# EAGLE board fmcboard_v1.0 (EAGLE 9.6.2)
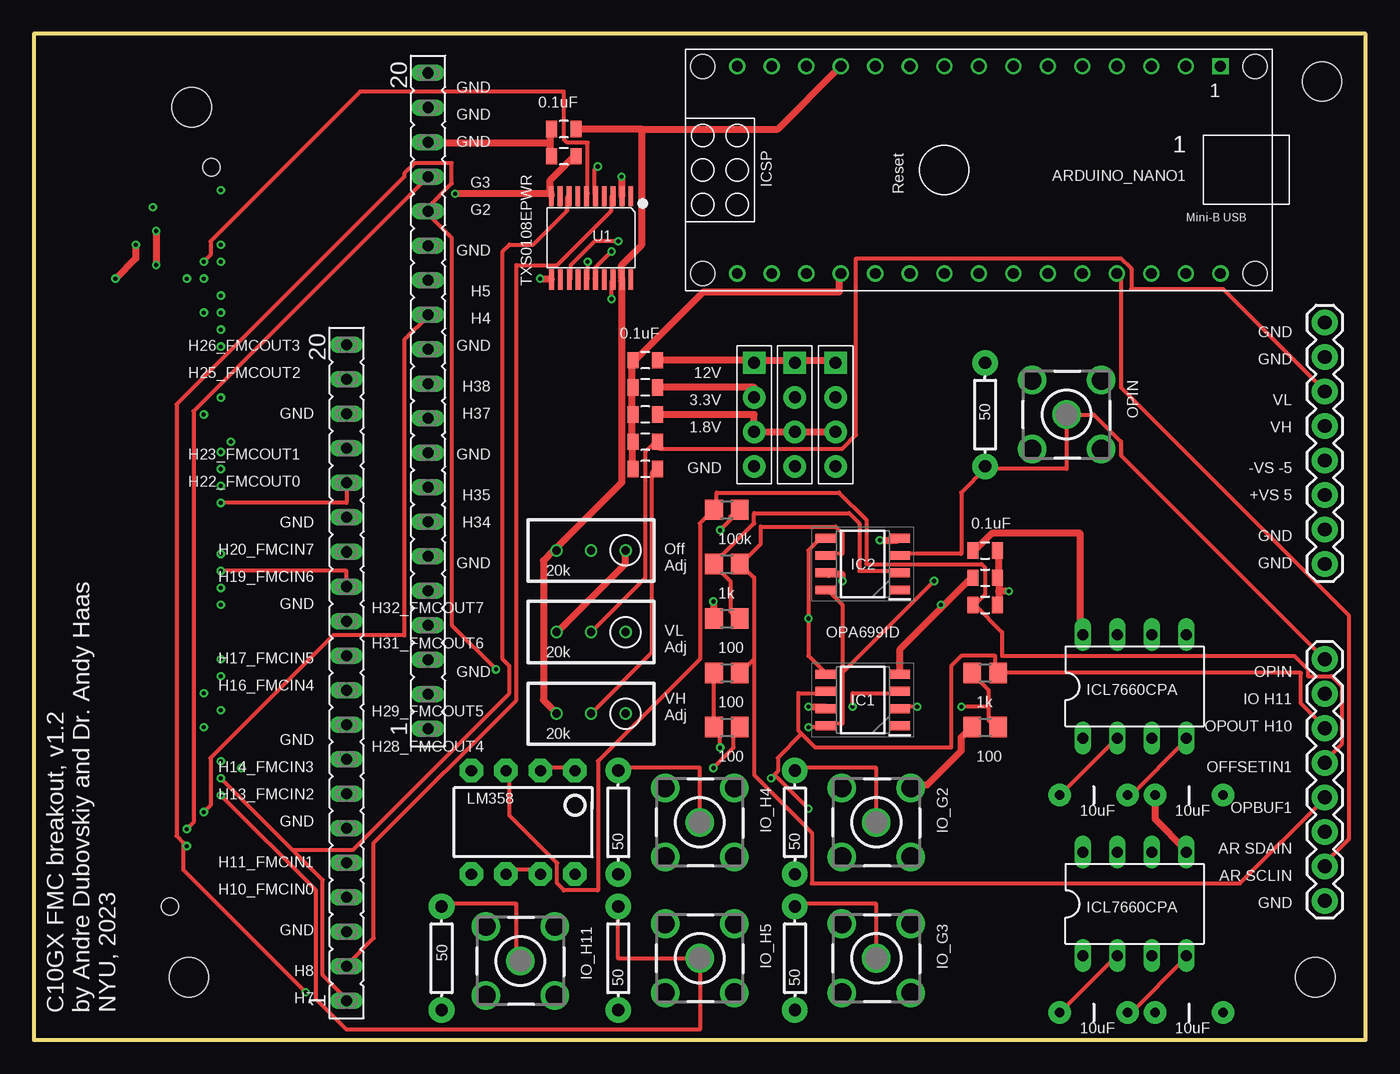
[diagram p0: board, top side]
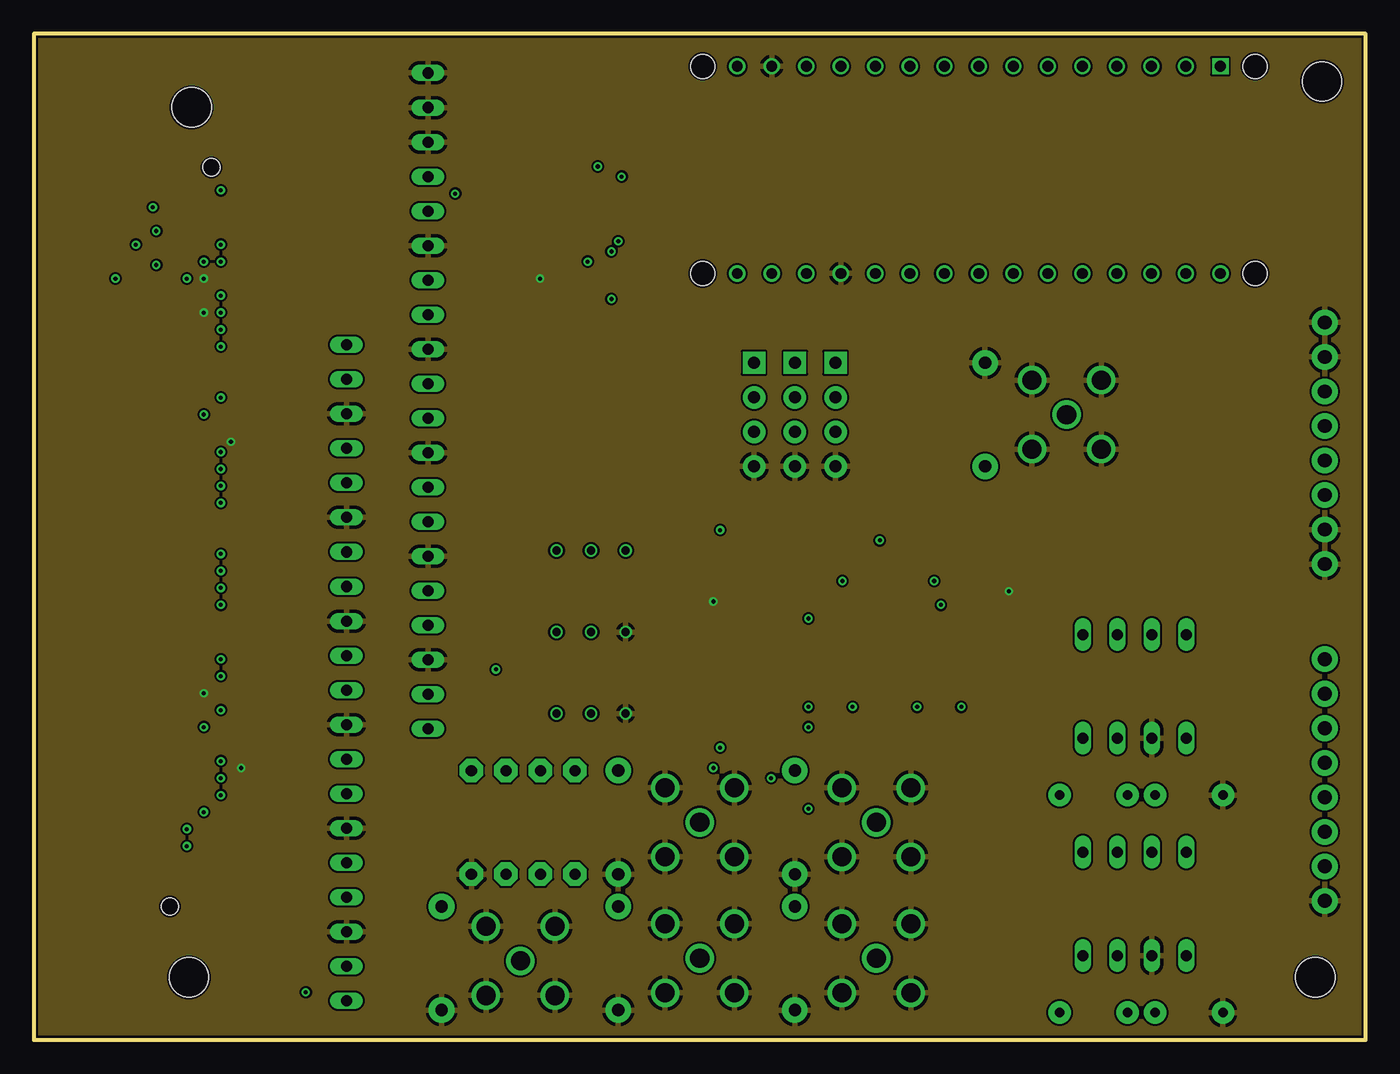
[diagram p1: board, inner layer topgnd]
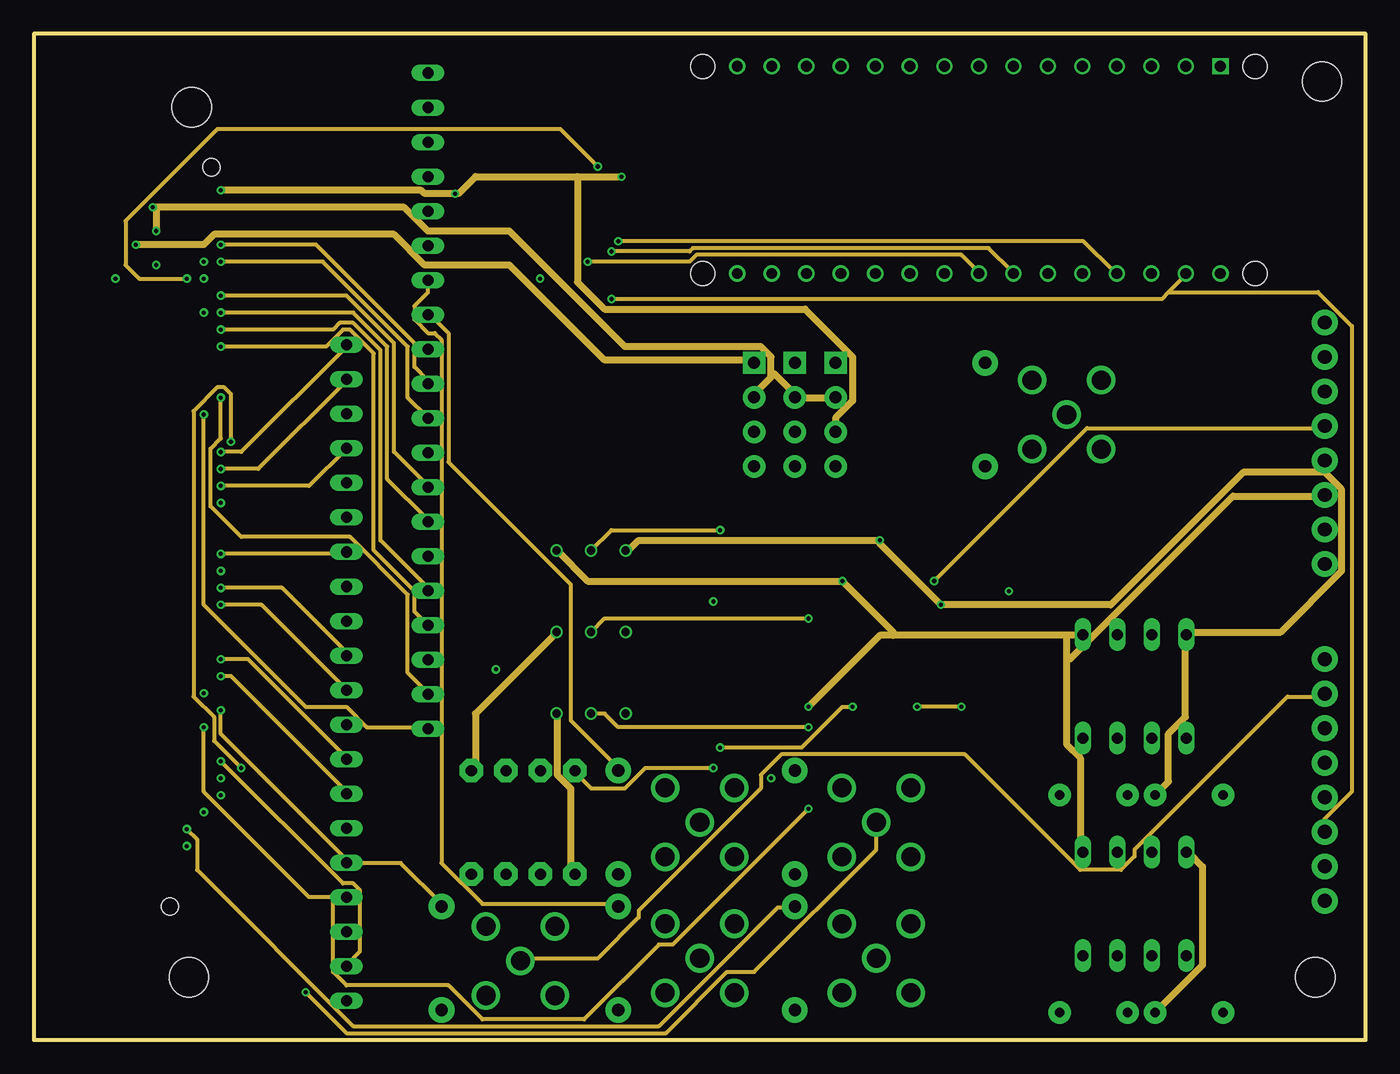
[diagram p2: board, inner layer route]
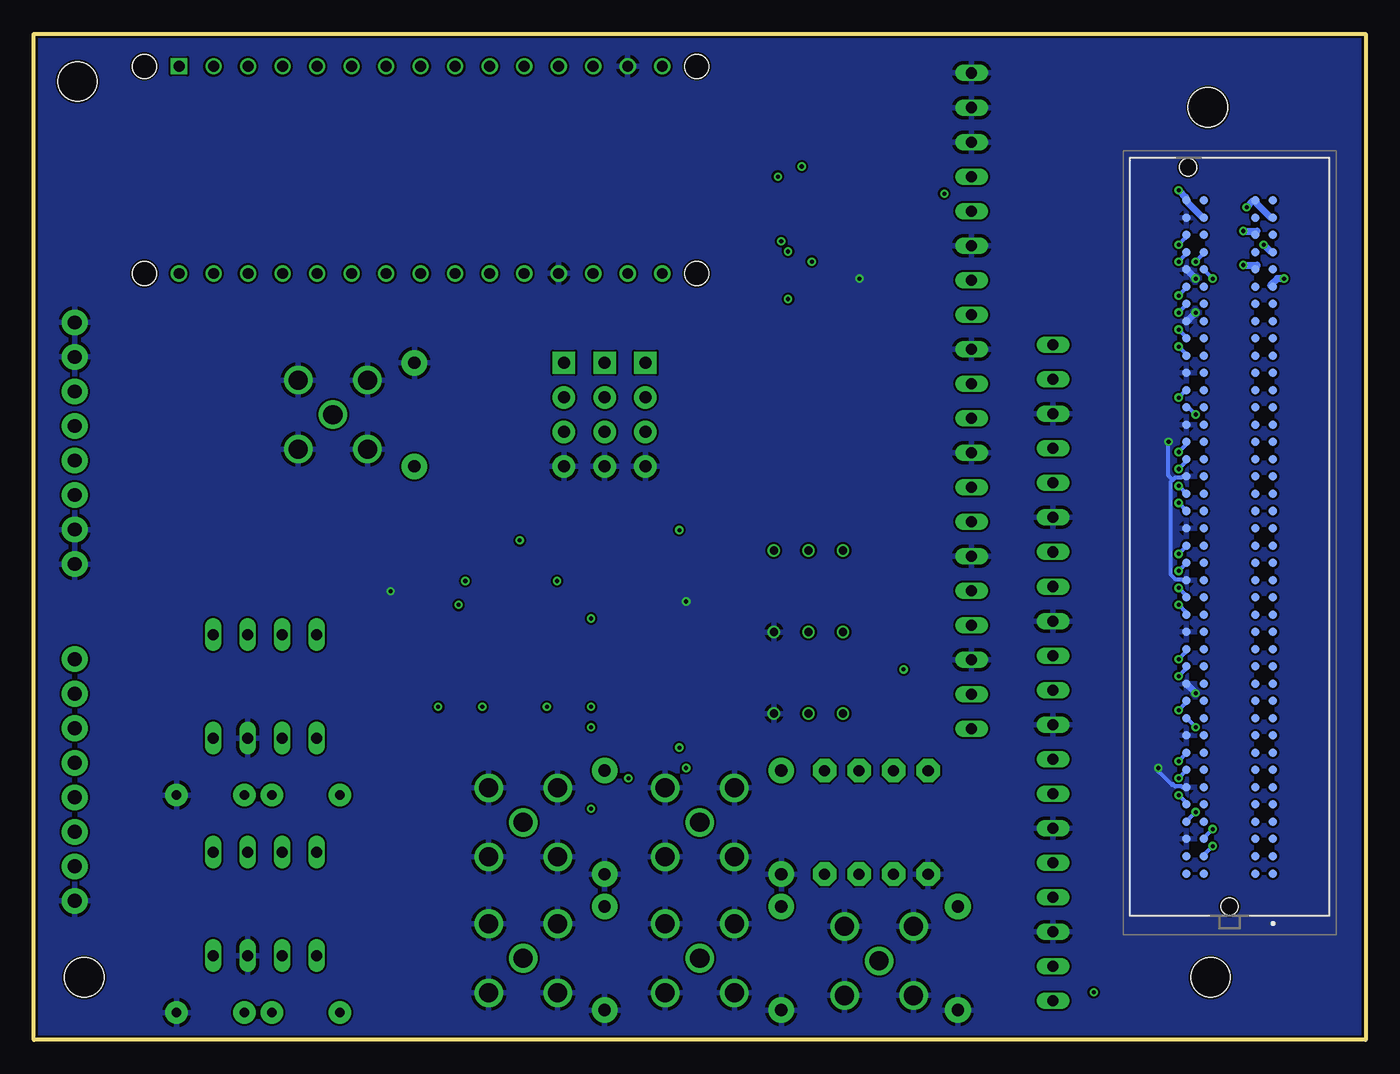
[diagram p3: board, bottom side, seen from below]

Size 98 x 74 mm. Coordinates in mm from the lower left corner, seen from the top.
Outline: 0,74 0,0 98,0 98,74 0,74
Copper layers (1*2*15*16): top 0.035mm / dielectric 0.2mm / topgnd 0.0175mm / dielectric 0.3mm / route 0.0175mm / dielectric 0.2mm / gnd 0.035mm
Design rules "Seeed_AllPCB_MacroFab_haas6mil": minimum track width 6mil, minimum drill 12mil, track to track 6mil, track to pad 6mil, pad to pad 6mil, via to via 6mil, smd to smd 0mil, copper to edge 6mil, drill to drill 6mil, minimum pad ring 6mil, minimum via ring 6mil, stop-mask expansion 6mil, vias tented up to drill 25mil, thermal gap 10mil
Net classes: 0 default: width 0.305 mm; 1 power: width 0.508 mm; 2 gnd: width 0.305 mm
Holes 2.9 mm at 11.4,4.6 94.8,70.5 11.6,68.6 94.3,4.6

## Footprints (pad centres in the part's own frame; a part is rotated, then mirrored left to right if it is on the bottom)
ARDUINO_NANO = drill 0.8 square: 1 -20.32,-7.62 | drill 0.8: 2 -17.78,-7.62; 3 -15.24,-7.62; 4 -12.7,-7.62; 5 -10.16,-7.62; 6 -7.62,-7.62; 7 -5.08,-7.62; 8 -2.54,-7.62; 9 0,-7.62; 10 2.54,-7.62; 11 5.08,-7.62; 12 7.62,-7.62; 13 10.16,-7.62; 14 12.7,-7.62; 15 15.24,-7.62; 16 15.24,7.62; 17 12.7,7.62; 18 10.16,7.62; 19 7.62,7.62; 20 5.08,7.62; 21 2.54,7.62; 22 0,7.62; 23 -2.54,7.62; 24 -5.08,7.62; 25 -7.62,7.62; 26 -10.16,7.62; 27 -12.7,7.62; 28 -15.24,7.62; 29 -17.78,7.62; 30 -20.32,7.62 | hole 1.778: -22.86,-7.62; -22.86,7.62; 17.78,7.62; 17.78,-7.62
CAP-PTH-5MM = drill 0.7 pad 1.651: 1 -2.5,0; 2 2.5,0
0805 = smd 0.8 x 1.2: 1 -0.9,0; 2 0.9,0
SOIC127P600X175-8N = smd 1.528 x 0.65: 1 -2.711,1.905; 2 -2.711,0.635; 3 -2.711,-0.635; 4 -2.711,-1.905; 5 2.711,-1.905; 6 2.711,-0.635; 7 2.711,0.635; 8 2.711,1.905
DIL08 = drill 0.813 long: 1 -3.81,-3.81; 2 -1.27,-3.81; 3 1.27,-3.81; 4 3.81,-3.81; 5 3.81,3.81; 6 1.27,3.81; 7 -1.27,3.81; 8 -3.81,3.81
DIP08 = drill 0.813 pad 1.727 octagon: 1 -3.81,-3.81; 2 -1.27,-3.81; 3 1.27,-3.81; 4 3.81,-3.81; 5 3.81,3.81; 6 1.27,3.81; 7 -1.27,3.81; 8 -3.81,3.81
BU-SMB-V = drill 1.4: 1 0,0; 2 -2.54,2.54; 3 2.54,2.54; 4 2.54,-2.54; 5 -2.54,-2.54
1X08 = drill 1.016 pad 1.88: 1 0,0; 2 2.54,0; 3 5.08,0; 4 7.62,0; 5 10.16,0; 6 12.7,0; 7 15.24,0; 8 17.78,0
ASP13460401 = smd 0.64 x 0.64: C1 24.765,3.175; C2 23.495,3.175; C3 22.225,3.175; C4 20.955,3.175; C5 19.685,3.175; C6 18.415,3.175; C7 17.145,3.175; C8 15.875,3.175; C9 14.605,3.175; C10 13.335,3.175; C11 12.065,3.175; C12 10.795,3.175; C13 9.525,3.175; C14 8.255,3.175; C15 6.985,3.175; C16 5.715,3.175; C17 4.445,3.175; C18 3.175,3.175; C19 1.905,3.175; C20 0.635,3.175; C21 -0.635,3.175; C22 -1.905,3.175; C23 -3.175,3.175; C24 -4.445,3.175; C25 -5.715,3.175; C26 -6.985,3.175; C27 -8.255,3.175; C28 -9.525,3.175; C29 -10.795,3.175; C30 -12.065,3.175; C31 -13.335,3.175; C32 -14.605,3.175; C33 -15.875,3.175; C34 -17.145,3.175; C35 -18.415,3.175; C36 -19.685,3.175; C37 -20.955,3.175; C38 -22.225,3.175; C39 -23.495,3.175; C40 -24.765,3.175; D1 24.765,1.905; D2 23.495,1.905; D3 22.225,1.905; D4 20.955,1.905; D5 19.685,1.905; D6 18.415,1.905; D7 17.145,1.905; D8 15.875,1.905; D9 14.605,1.905; D10 13.335,1.905; D11 12.065,1.905; D12 10.795,1.905; D13 9.525,1.905; D14 8.255,1.905; D15 6.985,1.905; D16 5.715,1.905; D17 4.445,1.905; D18 3.175,1.905; D19 1.905,1.905; D20 0.635,1.905; D21 -0.635,1.905; D22 -1.905,1.905; D23 -3.175,1.905; D24 -4.445,1.905; D25 -5.715,1.905; D26 -6.985,1.905; D27 -8.255,1.905; D28 -9.525,1.905; D29 -10.795,1.905; D30 -12.065,1.905; D31 -13.335,1.905; D32 -14.605,1.905; D33 -15.875,1.905; D34 -17.145,1.905; D35 -18.415,1.905; D36 -19.685,1.905; D37 -20.955,1.905; D38 -22.225,1.905; D39 -23.495,1.905; D40 -24.765,1.905; G1 24.765,-1.905; G2 23.495,-1.905; G3 22.225,-1.905; G4 20.955,-1.905; G5 19.685,-1.905; G6 18.415,-1.905; G7 17.145,-1.905; G8 15.875,-1.905; G9 14.605,-1.905; G10 13.335,-1.905; G11 12.065,-1.905; G12 10.795,-1.905; G13 9.525,-1.905; G14 8.255,-1.905; G15 6.985,-1.905; G16 5.715,-1.905; G17 4.445,-1.905; G18 3.175,-1.905; G19 1.905,-1.905; G20 0.635,-1.905; G21 -0.635,-1.905; G22 -1.905,-1.905; G23 -3.175,-1.905; G24 -4.445,-1.905; G25 -5.715,-1.905; G26 -6.985,-1.905; G27 -8.255,-1.905; G28 -9.525,-1.905; G29 -10.795,-1.905; G30 -12.065,-1.905; G31 -13.335,-1.905; G32 -14.605,-1.905; G33 -15.875,-1.905; G34 -17.145,-1.905; G35 -18.415,-1.905; G36 -19.685,-1.905; G37 -20.955,-1.905; G38 -22.225,-1.905; G39 -23.495,-1.905; G40 -24.765,-1.905; H1 24.765,-3.175; H2 23.495,-3.175; H3 22.225,-3.175; H4 20.955,-3.175; H5 19.685,-3.175; H6 18.415,-3.175; H7 17.145,-3.175; H8 15.875,-3.175; H9 14.605,-3.175; H10 13.335,-3.175; H11 12.065,-3.175; H12 10.795,-3.175; H13 9.525,-3.175; H14 8.255,-3.175; H15 6.985,-3.175; H16 5.715,-3.175; H17 4.445,-3.175; H18 3.175,-3.175; H19 1.905,-3.175; H20 0.635,-3.175; H21 -0.635,-3.175; H22 -1.905,-3.175; H23 -3.175,-3.175; H24 -4.445,-3.175; H25 -5.715,-3.175; H26 -6.985,-3.175; H27 -8.255,-3.175; H28 -9.525,-3.175; H29 -10.795,-3.175; H30 -12.065,-3.175; H31 -13.335,-3.175; H32 -14.605,-3.175; H33 -15.875,-3.175; H34 -17.145,-3.175; H35 -18.415,-3.175; H36 -19.685,-3.175; H37 -20.955,-3.175; H38 -22.225,-3.175; H39 -23.495,-3.175; H40 -24.765,-3.175 | hole 1.27: 27.189,0; -27.191,-3.05
H4-2.54 = drill 0.889 pad 1.651 square: 1 0,3.81 | drill 0.889 pad 1.651: 2 0,1.27; 3 0,-1.27; 4 0,-3.81
RTRIM3296W = drill 0.61: 1 0,-2.54; 2 0,0; 3 0,2.54
AXIAL-0.3 = drill 0.9 pad 1.88: P$1 -3.81,0; P$2 3.81,0
R0805 = smd 1.3 x 1.5: 1 -0.95,0; 2 0.95,0
FE20 = drill 0.813 long: 1 -24.13,0; 2 -21.59,0; 3 -19.05,0; 4 -16.51,0; 5 -13.97,0; 6 -11.43,0; 7 -8.89,0; 8 -6.35,0; 9 -3.81,0; 10 -1.27,0; 11 1.27,0; 12 3.81,0; 13 6.35,0; 14 8.89,0; 15 11.43,0; 16 13.97,0; 17 16.51,0; 18 19.05,0; 19 21.59,0; 20 24.13,0
TSSOP20-0.65-6.5X4.4MM = smd 0.35 x 1.5: 1 -2.925,-3.065; 2 -2.275,-3.065; 3 -1.625,-3.065; 4 -0.975,-3.065; 5 -0.325,-3.065; 6 0.325,-3.065; 7 0.975,-3.065; 8 1.625,-3.065; 9 2.275,-3.065; 10 2.925,-3.065; 11 2.91,3.065; 12 2.26,3.065; 13 1.61,3.065; 14 0.96,3.065; 15 0.325,3.065; 16 -0.325,3.065; 17 -0.975,3.065; 18 -1.625,3.065; 19 -2.275,3.065; 20 -2.925,3.065

## Placement (x,y rotation side)
ARDUINO_NANO1  1  [ARDUINO_NANO]  67,64 180 top
C1  10uF  [CAP-PTH-5MM]  78,2 0 top
C2  10uF  [CAP-PTH-5MM]  85,2 0 top
C3  0.1uF  [0805]  70,36 0 top
C4  10uF  [CAP-PTH-5MM]  78,18 0 top
C5  0.1uF  [0805]  45,46 180 top
C6  10uF  [CAP-PTH-5MM]  85,18 0 top
C7  0.1uF  [0805]  45,42 180 top
C8  0.1uF  [0805]  45,44 180 top
C9  0.1uF  [0805]  39,67 180 top
C10  0.1uF  [0805]  70,34 0 top
C11  0.1uF  [0805]  70,32 0 top
C12  0.1uF  [0805]  45,50 180 top
C13  0.1uF  [0805]  45,48 180 top
C14  0.1uF  [0805]  39,65 180 top
IC1  OPA699ID  [SOIC127P600X175-8N]  61,25 180 top
IC2  OPA699ID  [SOIC127P600X175-8N]  61,35 180 top
IC3  ICL7660CPA  [DIL08]  81,26 0 top
IC4  ICL7660CPA  [DIL08]  81,10 0 top
IC5  LM358  [DIP08]  36,16 180 top
IO_G2  BU-SMB-V  [BU-SMB-V]  62,16 270 top
IO_G3  BU-SMB-V  [BU-SMB-V]  62,6 270 top
IO_H4  BU-SMB-V  [BU-SMB-V]  49,16 270 top
IO_H5  BU-SMB-V  [BU-SMB-V]  49,6 270 top
IO_H11  BU-SMB-V  [BU-SMB-V]  35.8,5.8 270 top
J1  8pin  [1X08]  95,35 90 top
J2  ASP-134604-01  [ASP13460401]  10,37 270 bottom
J3  4p-2.54  [H4-2.54]  59,46 0 top
J4  4p-2.54  [H4-2.54]  56,46 0 top
J5  8pin  [1X08]  95,28 270 top
J12  4p-2.54  [H4-2.54]  53,46 0 top
OPIN  BU-SMB-V  [BU-SMB-V]  76,46 270 top
R1  20k  [RTRIM3296W]  41,36 90 top
R2  50  [AXIAL-0.3]  70,46 270 top
R3  100k  [R0805]  51,39 0 top
R4  50  [AXIAL-0.3]  56,16 90 top
R5  50  [AXIAL-0.3]  56,6 90 top
R6  50  [AXIAL-0.3]  30,6 90 top
R7  20k  [RTRIM3296W]  41,24 90 top
R8  20k  [RTRIM3296W]  41,30 90 top
R9  1k  [R0805]  70,27 0 top
R10  100  [R0805]  70,23 0 top
R11  1k  [R0805]  51,35 0 top
R12  100  [R0805]  51,31 0 top
R13  100  [R0805]  51,27 0 top
R14  100  [R0805]  51,23 0 top
R15  50  [AXIAL-0.3]  43,16 90 top
R16  50  [AXIAL-0.3]  43,6 90 top
SV1  20  [FE20]  23,27 90 top
SV2  20  [FE20]  29,47 90 top
U1  TXS0108EPWR  [TSSOP20-0.65-6.5X4.4MM]  41,59 180 top

## Library data of the parts
ARDUINO_NANO1 = ArduinoNanoV30
C1 C2 C4 C6 = SparkFun-Capacitors
C3 C5 C7-C14 = SparkFun-Passives
IC1 IC2 = OPA699ID; DESCRIPTION: Texas Instruments OPA699ID Op Amp, 880MHz, 9 V, 8-Pin SOIC; HEIGHT: 1.75mm; MANUFACTURER_NAME: Texas Instruments; MANUFACTURER_PART_NUMBER: OPA699ID; MOUSER_PART_NUMBER: 595-OPA699ID; MOUSER_PRICE-STOCK: https://www.mouser.co.uk/ProductDetail/Texas-Instruments/OPA699ID?qs=wgAEGBTxy7n0Nk%252BpyQzyiA%3D%3D
IC3 IC4 = maxim; MF: INTERSIL; MPN: ICL7660CPA; OC_FARNELL: 1018170; OC_NEWARK: 06F7441
IC5 = SparkFun-AnalogIC; PROD_ID: IC-09172
IO_G2 IO_G3 IO_H4 IO_H5 IO_H11 OPIN = con-coax; OC_FARNELL: unknown; OC_NEWARK: unknown
J1 J5 = SparkFun-Connectors; PROD_ID: CONN-08438
J2 = ASP-134604-01; DESCRIPTION: SAMTEC - ASP-134604-01 - Board-To-Board Connector, Vita 57 XMC, 1.27 mm, 160 Contacts, Header, ASP Series, Surface Mount; HEIGHT: 7.11mm; MANUFACTURER_NAME: SAMTEC; MANUFACTURER_PART_NUMBER: ASP-134604-01; MOUSER_PART_NUMBER: 200-ASP-134604-01; MOUSER_PRICE-STOCK: https://www.mouser.co.uk/ProductDetail/Samtec/ASP-134604-01?qs=Rp%2FUEJiACm00i8g2mQ6XNw%3D%3D
J3 J4 J12 = Seeed-Connector; MPN: F185-1104A1BSYA1
R1 R7 R8 = resistor
R2 R4-R6 R15 R16 = SparkFun-Resistors
R3 R9-R14 = rcl; SPICEPREFIX: R
SV1 SV2 = con-lsta; OC_FARNELL: unknown; OC_NEWARK: unknown
U1 = Seeed-IC; MPN: TXS0108EPWR

## Nets
1V8 [power]: C5.1 C14.1 J2.G39 J2.H40 J3.3 J4.3 J12.3 U1.2 U1.10
3V3 [power]: C13.1 J2.C39 J2.D36 J2.D38 J2.D40 J3.2 J4.2 J12.2
12V [power]: C12.1 J2.C35 J2.C37 J3.1 J4.1 J12.1
AR_G36: ARDUINO_NANO1.24 U1.16
AR_G37: ARDUINO_NANO1.23 U1.15
AR_SCLIN: ARDUINO_NANO1.27 J5.7 U1.13
AR_SDAIN: ARDUINO_NANO1.29 J5.6 U1.18
G2: IO_G2.1 J2.G2 R4.P$2 SV2.16
G3: IO_G3.1 J2.G3 R5.P$2 SV2.17
G36: J2.G36 U1.5
G37: J2.G37 U1.6
GND [gnd]: ARDUINO_NANO1.14 ARDUINO_NANO1.19 C2.2 C3.2 C5.2 C6.2 C7.2 C8.2 C9.2 C10.2 C11.2 C12.2 C13.2 C14.2 IC3.3 IC4.3 IC5.5 IO_G2.2 IO_G2.3 IO_G2.4 IO_G2.5 IO_G3.2 IO_G3.3 IO_G3.4 IO_G3.5 IO_H4.2 IO_H4.3 IO_H4.4 IO_H4.5 IO_H5.2 IO_H5.3 IO_H5.4 IO_H5.5 IO_H11.2 IO_H11.3 IO_H11.4 IO_H11.5 J1.1 J1.2 J1.7 J1.8 J2.H3 J2.H6 J2.H9 J2.H12 J2.H15 J2.H18 J2.H21 J2.H24 J2.H27 J2.H30 J2.H33 J2.H36 J2.H39 J3.4 J4.4 J5.8 J12.4 OPIN.2 OPIN.3 OPIN.4 OPIN.5 R2.P$1 R4.P$1 R5.P$1 R6.P$1 R7.1 R8.1 R10.1 R12.1 R15.P$1 R16.P$1 SV1.3 SV1.6 SV1.9 SV1.12 SV1.15 SV1.18 SV2.3 SV2.6 SV2.9 SV2.12 SV2.15 SV2.18 SV2.19 SV2.20 U1.11
H4: IO_H4.1 J2.H4 R15.P$2 SV2.13
H5: IO_H5.1 J2.H5 R16.P$2 SV2.14
H13: J2.H13 SV1.7
H14: J2.H14 SV1.8
H16: J2.H16 SV1.10
H17: J2.H17 SV1.11
H19: J2.H19 SV1.13
H20: J2.H20 SV1.14
H22: J2.H22 SV1.16
H23: J2.H23 SV1.17
H25: J2.H25 SV1.19
H26: J2.H26 SV1.20
H27: J2.H28 SV2.1
H28: J2.H29 SV2.2
H31: J2.H31 SV2.4
H32: J2.H32 SV2.5
H34: J2.H34 SV2.7
H35: J2.H35 SV2.8
H37: J2.H37 SV2.10
H38: J2.H38 SV2.11
IO1: IC2.3 J5.1 OPIN.1 R2.P$2
IO2_H11: IO_H11.1 J2.H11 J5.2 R6.P$2 SV1.5
N$1: IC1.3 R13.1 R14.1
N$2: C4.1 IC3.2
N$3: IC1.2 R9.1 R10.2
N$4: C4.2 IC3.4
N$5: C1.1 IC4.2
N$6: C1.2 IC4.4
N$7: IC2.2 R11.1 R12.2
N$8: R1.2 R3.2
N$9: IC5.6 IC5.7
OFFSETIN1: C11.1 IC5.3 J5.4 R3.1
OPBUF1: IC2.6 J5.5 R11.2 R13.2
OPOUT1_H10: IC1.6 J2.H10 J5.3 R9.2 SV1.4
SCLIN: J2.H7 SV1.1 U1.8
SDAIN: J2.H8 SV1.2 U1.3
VH: C7.1 IC1.8 IC2.8 J1.5 R7.2
VIN [power]: ARDUINO_NANO1.15
VIN1: IC5.1 IC5.2 R14.2
VL: C8.1 IC1.5 IC2.5 J1.6 R8.2
VS+ [power]: ARDUINO_NANO1.12 C3.1 C9.1 IC1.7 IC2.7 IC3.8 IC4.8 IC5.8 J1.3 R1.3 R7.3 U1.19
VS- [power]: C2.1 C6.1 C10.1 IC1.4 IC2.4 IC3.5 IC4.5 IC5.4 J1.4 R1.1 R8.3

## Tracks (layer width: path | path; a pad name or v marks a point on that pad's centre or on a via)
1V8  (via drill 0.3)
  top 0.508: C5.1 53,46 J12.3 53.25,44.75 56,44.75 J4.3 56.25,44.75 59,44.75 J3.3 | v31,62.25 38,62.25 U1.10 38,62.5 38,63.25 39.75,65 C14.1 | v43.25,63.5 43.25,62.25 U1.2
  route 0.508: v13.75,62.5 28.5,62.5 28.75,62.25 v31,62.25 31.25,62.25 32.5,63.5 40,63.5 | 40,63.5 v43.25,63.5 | J3.3 59,45.75 60.25,47 60.25,50.25 56.75,53.75 42,53.75 40,55.75 40,63.5
  gnd 0.508: v13.75,62.5 13.25,62 J2.H40 13,61.5 12,60.5 J2.G39
3V3  (via drill 0.3)
  top 0.508: C13.1 53,48 J12.2 | v9,59.5 v9,57
  route 0.508: 9,61.25 27.25,61.25 29,59.5 35,59.5 43.5,51 53.5,51 54.25,50.25 54.25,49 | 9,61.25 v8.75,61.25 | 54.25,49 54.25,48.75 53,47.5 J12.2 | 54.25,49 54.5,49 56,47.5 J4.2 56.25,47.25 59,47.25 J3.2 | 9,61.25 v9,59.5
  gnd 0.508: v8.75,61.25 8.25,61.75 J2.D40 8,61.5 7,60.5 J2.C39 | v9,57 8,57 J2.D36 | v9,59.5 8,59.5 J2.D38
12V  (via drill 0.3)
  top 0.508: C12.1 53,50 J12.1 53.25,50 56,50 J4.1 56.25,50 59,50 J3.1 | v6,56 7.5,57.5 v7.5,58.5
  route 0.508: v7.5,58.5 12.5,58.5 13.25,59.25 26.5,59.25 28.75,57 35,57 42,50 53,50 J12.1
  gnd 0.508: v7.5,58.5 7,58 J2.C37 | v6,56 6.5,56 7,55.5 J2.C35
AR_G36  (via drill 0.3)
  top 0.305: v42.5,58 41.25,56.75 41.25,56 U1.16
  route 0.305: v42.5,58 48.25,58 48.5,58.25 70.25,58.25 72,56.5 ARDUINO_NANO1.24
AR_G37  (via drill 0.3)
  top 0.305: v40.75,57.25 40.75,56 U1.15
  route 0.305: v40.75,57.25 48.25,57.25 48.75,57.75 68.25,57.75 69.5,56.5 ARDUINO_NANO1.23
AR_SCLIN  (via drill 0.3)
  top 0.305: v43,58.75 41.25,58.75 39.5,57 39.5,56 U1.13 | J5.7 95,13 96.75,14.75 96.75,31.25 80,48 80,56 79.75,56.25 ARDUINO_NANO1.27
  route 0.305: v43,58.75 77.25,58.75 79.5,56.5 ARDUINO_NANO1.27
AR_SDAIN  (via drill 0.3)
  top 0.305: v42.5,54.5 42.5,55.75 U1.18
  route 0.305: v42.5,54.5 83,54.5 83.5,55 | 83.5,55 84.75,56.25 ARDUINO_NANO1.29 | J5.6 95,16.25 97,18.25 97,52.5 94.5,55 83.5,55
G2  (via drill 0.3)
  top 0.305: IO_G2.1 62,20 56,20 R4.P$2 | 11,14.5 10.5,15 10.5,46.75 27.25,63.5 27.25,63.75 28,64.5 30.75,64.5 30.75,63 29,61.25 SV2.16 29,60.75 30.75,59 30.75,30.5 v34,27.25 | 11,14.5 v11.25,14.25 | v20,3.5 11,12.5 11,14.5
  route 0.305: IO_G2.1 62,14 53,5 51,5 46.5,0.5 23,0.5 v20,3.5
  gnd 0.305: v11.25,14.25 11.75,13.75 J2.G2
G3  (via drill 0.3)
  top 0.305: IO_G3.1 62,10 56,10 R5.P$2 | v11.25,15.5 11.75,16 11.75,46.25 SV2.17
  route 0.305: v11.25,15.5 12,14.75 12,12.5 23.5,1 46,1 54.75,9.75 56,9.75 R5.P$2
  gnd 0.305: v11.25,15.5 11.75,15 J2.G3
G36  (via drill 0.3)
  top 0.305: v41.5,64.25 41.25,64 41.25,62.25 U1.5
  route 0.305: v11.25,56 7.75,56 6.75,57 6.75,60.25 13.5,67 38.75,67 v41.5,64.25
  gnd 0.305: v11.25,56 11.75,56.5 J2.G36
G37  (via drill 0.3)
  top 0.305: v12.5,57.25 13,57.75 13,58.75 24,69.75 39,69.75 39,66.25 39.25,66 40.75,66 40.75,62.25 U1.6
  gnd 0.305: v12.5,57.25 12,57.75 J2.G37
GND  (via drill 0.3)
  top 0.508: C7.2 44,42 44,44 C8.2 44,44.25 44,46 C5.2 44,46.25 44,48 C13.2 44,48.25 44,50 C12.2 44.25,50 49.25,55 59.25,55 59.25,56.25 ARDUINO_NANO1.19 | 71,33 71,34 C10.2 71,34.25 71,36 C3.2 | 71,33 71,32 C11.2 | 38,66 38,67 C9.2 | 38,66 38,65 C14.2 | R10.1 69,23 68.25,22.25 68.25,21.25 65.75,18.75 64.75,18.75 IO_G2.2 | v37.25,56 38,56 U1.11 | v50,32.25 50,31 R12.1 | 38,66 29,66 SV2.18 | v71.75,33 71,33
  route 0.305: v15.25,20 13.25,22 13.25,23.75 11.75,25.25 11.75,46.25 13.5,48 14,48 14.5,47.5 v14.5,44
  gnd 0.305: J2.H24 13.44,41.45 13.53,41.36 14,41.36 14.18,41.18 | J2.H18 13.24,33.89 14,33.89 14.36,34.25 14.36,41 14.18,41.18 | J2.H6 13.47,18.59 13.53,18.64 14,18.64 14.18,18.82 14.25,18.75 15.25,19.75 v15.25,20 | v14.5,44 14.5,41.5 14.18,41.18
  gnd 0.508: v12.5,25.5 13,26 J2.H12 | v12.5,53.5 13,53 J2.H33 | v12.5,56 13,56.5 J2.H36
  pour gnd: 100,76 100,-2 -3,-2 -3,76
  pour gnd: 100,76 100,-2 -3,-2 -3,76
  pour topgnd: 101,77 101,-3 -4,-3 -4,77
H4  (via drill 0.3)
  top 0.305: v12.5,16.75 13,17.25 13,20.75 22,29.75 27.25,29.75 27.25,51.5 29,53.25 SV2.13 | IO_H4.1 49,20 43,20 R15.P$2
  route 0.305: R15.P$2 43,20 39.5,23.5 39.5,33.5 30.5,42.5 30.5,52 29,53.5 SV2.13
  gnd 0.305: v12.5,16.75 13,16.25 J2.H4
H5  (via drill 0.3)
  top 0.305: v13.75,18 20.75,11 20.75,3 23,0.75 49,0.75 IO_H5.1 43,6 R16.P$2
  route 0.305: SV2.14 29,55 28,54 28,53 29,52 29.5,52 30,51.5 30,13 33,10 43,10 R16.P$2
  gnd 0.305: v13.75,18 13.25,17.5 J2.H5
H13  (via drill 0.3)
  route 0.305: v13.75,26.75 14.5,26.75 23,18.25 SV1.7
  gnd 0.305: v13.75,26.75 13.25,27.25 J2.H13
H14  (via drill 0.3)
  route 0.305: v13.75,28 15.75,28 23,20.75 SV1.8
  gnd 0.305: v13.75,28 13.25,28.5 J2.H14
H16  (via drill 0.3)
  route 0.305: v13.75,32 16.75,32 23,25.75 SV1.10
  gnd 0.305: v13.75,32 13.25,31.5 J2.H16
H17  (via drill 0.3)
  route 0.305: v13.75,33.25 18.25,33.25 23,28.5 SV1.11
  gnd 0.305: v13.75,33.25 13.25,32.75 J2.H17
H19  (via drill 0.3)
  top 0.305: v13.75,34.5 23,34.5 SV1.13
  gnd 0.305: v13.75,34.5 13.25,35 J2.H19
H20  (via drill 0.3)
  route 0.305: v13.75,35.75 23,35.75 SV1.14
  gnd 0.305: v13.75,35.75 13.25,36.25 J2.H20
H22  (via drill 0.3)
  top 0.305: v13.75,39.5 23,39.5 SV1.16
  gnd 0.305: v13.75,39.5 13.25,39 J2.H22
H23  (via drill 0.3)
  route 0.305: v13.75,40.75 20.25,40.75 SV1.17
  gnd 0.305: v13.75,40.75 J2.H23
H25  (via drill 0.3)
  route 0.305: v13.75,42 16.5,42 23,48.5 SV1.19
  gnd 0.305: v13.75,42 13.25,42.5 J2.H25
H26  (via drill 0.3)
  route 0.305: v13.75,43.25 15.25,43.25 23,51 SV1.20
  gnd 0.305: v13.75,43.25 13.25,43.75 J2.H26
H27  (via drill 0.3)
  route 0.305: v12.5,46 12.5,32 20,24.5 23,24.5 24.5,23 29,23 SV2.1
  gnd 0.305: v12.5,46 13,46.5 J2.H28
H28  (via drill 0.3)
  route 0.305: v13.75,47.25 13.75,44.25 13,43.5 13,39.25 15.25,37 23.25,37 27.5,32.75 27.5,27 29,25.5 SV2.2
  gnd 0.305: v13.75,47.25 13.25,47.75 J2.H29
H31  (via drill 0.3)
  route 0.305: v13.75,51 21.5,51 22.75,52.25 23.25,52.25 25,50.5 25,36 28,33 28,31.5 SV2.4
  gnd 0.305: v13.75,51 13.25,50.5 J2.H31
H32  (via drill 0.3)
  route 0.305: v13.75,52.25 22,52.25 22.5,52.75 23.5,52.75 25.5,50.75 25.5,36.75 29,33.25 SV2.5
  gnd 0.305: v13.75,52.25 13.25,51.75 J2.H32
H34  (via drill 0.3)
  route 0.305: v13.75,53.5 23.5,53.5 26,51 26,41.25 29,38.25 SV2.7
  gnd 0.305: v13.75,53.5 13.25,54 J2.H34
H35  (via drill 0.3)
  route 0.305: v13.75,54.75 23,54.75 26.5,51.25 26.5,43.25 29,40.75 SV2.8
  gnd 0.305: v13.75,54.75 13.25,55.25 J2.H35
H37  (via drill 0.3)
  route 0.305: v13.75,57.25 21.25,57.25 27.5,51 27.5,47.25 29,45.75 SV2.10
  gnd 0.305: v13.75,57.25 13.25,57.75 J2.H37
H38  (via drill 0.3)
  route 0.305: v13.75,58.5 20.75,58.5 28,51.25 28,49.5 29,48.5 SV2.11
  gnd 0.305: v13.75,58.5 13.25,59 J2.H38
IO1
  top 0.305: 70,42 68.25,40.25 68.25,35.75 63.75,35.75 IC2.3 | J5.1 80,43 80,44 78,46 OPIN.1 76,42 70,42 | 70,42 R2.P$2
IO2_H11  (via drill 0.3)
  top 0.305: R6.P$2 30,10 35.5,10 35.5,6 IO_H11.1
  route 0.305: v13.75,24.25 13.75,22.5 23,13.25 SV1.5 23,13 27,13 30,10 R6.P$2 | J5.2 95,25.25 92.25,25.25 81,14 81,13.5 80,12.5 77,12.5 68.5,21 55,21 53.5,19.5 53.5,18.5 44.5,9.5 44.5,9 41.5,6 36,6 IO_H11.1
  gnd 0.305: v13.75,24.25 13.25,24.75 J2.H11
N$1  (via drill 0.3)
  top 0.305: v60.25,24.5 60.25,25.5 63.5,25.5 IC1.3 | R13.1 50,27 50,23 R14.1 50.5,23 v50.5,21.5
  route 0.305: v60.25,24.5 59.5,24.5 56.5,21.5 v50.5,21.5
N$2
  top 0.305: C4.1 79.5,22 IC3.2
N$3  (via drill 0.3)
  top 0.305: 70.25,24.5 70.25,25.75 69.25,26.75 69.25,27 R9.1 | 70.25,24.5 70.25,23.5 70.75,23 R10.2 | v65,24.5 63.75,24.5 IC1.2 | 70.25,24.5 v68.25,24.5
  route 0.305: v68.25,24.5 v65,24.5
N$4
  top 0.305: C4.2 80.75,18 84.75,22 IC3.4
N$5
  top 0.305: C1.1 79.5,6 IC4.2
N$6
  top 0.305: C1.2 80.75,2 84.75,6 IC4.4
N$7
  top 0.305: 50.25,35 50.25,34.75 51.25,33.75 51.25,31.5 51.75,31 R12.2 | 50.25,35 50.25,35.25 53,38 53,38.75 60,38.75 60.75,38 60.75,34.5 63.5,34.5 IC2.2 | 50.25,35 R11.1
N$8  (via drill 0.3)
  top 0.305: v50.5,37.5 51.25,38.25 51.25,38.5 51.75,39 R3.2
  route 0.305: v50.5,37.5 42.5,37.5 R1.2
N$9
  top 0.305: IC5.6 35,12.5 37,12.5 IC5.7
OFFSETIN1
  top 0.305: 69.25,32 70,32.75 70,34.75 69.75,35 61.25,35 61.25,38.25 59.25,40.25 50.25,40.25 50.25,39 R3.1 50,39 49,38 49,28 41.5,20.5 41.5,11 39,11 38.5,11.5 38.5,13 35,16.5 35,19.5 IC5.3 | 69.25,32 71.25,30 71.25,28.25 92.75,28.25 93.75,27.25 93.75,26.75 95.5,26.75 96.25,26 96.25,21.75 95,20.5 J5.4 | 69.25,32 C11.1
OPBUF1
  top 0.305: 53,28 52,27 R13.2 | 53,28 53,34 52,35 | 52,35 53.5,36.5 53.5,37.75 59,37.75 59.5,37.25 59.5,35.75 58.5,35.75 IC2.6 | 52,35 R11.2 | 53,28 53,19.5 57.25,15.25 57.25,11.5 88.75,11.5 95,17.75 J5.5
OPOUT1_H10  (via drill 0.3)
  top 0.305: J5.3 95,23 93.25,24.75 93.25,27 R9.2 70.75,27 70.75,28.25 68.25,28.25 67.5,27.5 67.5,21.5 57.5,21.5 56.5,22.5 | 56.5,22.5 56.25,22.75 56.25,25.5 58.25,25.5 IC1.6 | 54.5,19.5 54.75,19.75 54.75,20.75 56.5,22.5 | 54.5,19.5 v54.25,19.25 | 54.5,19.5 v57,17
  route 0.305: v12.5,23 12.5,18.25 20.25,10.5 22,10.5 | 22,10.5 SV1.4 | 22,10.5 22,5 23,4 30.5,4 33,1.5 40.5,1.5 46,7 47,7 v57,17
  gnd 0.305: v12.5,23 13,23.5 J2.H10
SCLIN  (via drill 0.3)
  top 0.305: 19,14 21.25,11.75 21.25,4.75 23,3 SV1.1 | 19,14 v13.75,19.25 | U1.8 39.25,62 39.25,61 36.75,58.5 35,58.5 34.5,58 34.5,28 35,27.5 35,25.5 23.5,14 19,14
  gnd 0.305: v13.75,19.25 13.25,19.75 J2.H7
SDAIN  (via drill 0.3)
  top 0.305: U1.3 42.5,62 42.5,61 38.5,57 35.5,57 35.5,25 25,14.5 25,7.5 23,5.5 SV1.2
  route 0.305: v13.75,20.5 22.75,11.5 23.5,11.5 24,11 24,6.5 23,5.5 SV1.2
  gnd 0.305: v13.75,20.5 13.25,21 J2.H8
VH  (via drill 0.3)
  top 0.305: C7.1 45.75,42 45.5,41.75 45.5,28.5 R7.2 | 59.5,27 59.5,32 58.5,33 IC2.8 | 59.5,27 59.5,23.25 58.5,23.25 IC1.8 58.25,23 v57,23 | 59.5,27 v66.25,33.75
  route 0.305: v66.25,33.75 77.5,45 95,45 J1.5 | R7.2 42,24 43,23 v57,23
VIN1  (via drill 0.3)
  top 0.305: IC5.2 37.5,20 39.5,20 IC5.1 | v50,20 51.5,21.5 51.5,23 R14.2
  route 0.305: v50,20 45,20 43.5,18.5 41,18.5 40,19.5 IC5.1
VL  (via drill 0.3)
  top 0.305: IC1.5 58.25,27 57,28.25 v57,31 57,36 57.75,36.75 58.25,36.75 IC2.5 | R8.2 45,34 45,43.25 45.75,44 C8.1 46,44 46,43.5 59.5,43.5 60.5,44.5 60.5,57.5 80,57.5 80.75,56.75 80.75,55.25 87.5,55.25 95,47.75 J1.6
  route 0.305: v57,31 42,31 R8.2
VS+  (via drill 0.3)
  top 0.508: C3.1 69.25,36 70.5,37.25 77,37.25 77,30 IC3.8 | v57,24.5 58.25,24.5 IC1.7 | v59.5,33.75 59.5,34.25 58.5,34.25 IC2.7 | 44.75,67 C9.1 | 44.75,67 44.75,58.5 43.25,57 43.25,56 U1.19 43.25,55.75 43.25,41 38.5,36.25 R1.3 38.25,36 37.5,35.25 37.5,25 38.5,24 R7.3 | 44.75,67 54.75,67 59.25,71.5 ARDUINO_NANO1.12
  route 0.508: v57,24.5 62.25,29.75 63.25,29.75 | 76,29.75 77,29.75 IC3.8 | 76,29.75 63.25,29.75 | 63.25,29.75 63.25,30 v59.5,33.75 40.75,33.75 38.5,36 R1.3 | 76,29.75 76,28 | 76,28 76,21.75 77,20.75 77,14 IC4.8 | J1.3 95,40 88.25,40 76.25,28 76,28 | IC5.8 39.5,12.5 39.5,18.5 38.5,19.5 38.5,24 R7.3
VS-  (via drill 0.3)
  top 0.508: 66.88,31.88 63.75,28.75 63.75,27 IC1.4 | 66.88,31.88 69,34 C10.1 | v62.25,36.75 63.5,36.75 IC2.4 | R8.3 38.5,30 43.5,35 43.5,36 R1.1 | v66.75,32 66.88,31.88 | C6.1 82.5,16.25 84.75,14 IC4.5
  route 0.508: R1.1 43.75,36 44.5,36.75 v62.25,36.75 62.25,36.5 v66.75,32 79.25,32 89,41.75 95,41.75 | C6.1 83.5,19 83.5,22.5 84.75,23.75 84.75,29.75 IC3.5 85,30 91.75,30 96.25,34.5 96.25,40.5 95,41.75 | C2.1 86,5.5 86,12.75 85,13.75 IC4.5 | 95,41.75 J1.4 | IC5.4 32.5,20 32.5,24 38.5,30 R8.3

## Text on the board
tPlace: GND | GND | GND | G3 | G2 | GND | H5 | H4 | H26_FMCOUT3 | GND | GND | H25_FMCOUT2 | 12V | GND | H38 | 3.3V | VL | GND | H37 | 1.8V | VH | H23_FMCOUT1 | GND | H22_FMCOUT0 | GND | -VS -5 | H35 | +VS 5 | GND | H34 | GND | H20_FMCIN7 | GND | GND | H19_FMCIN6 | Off / Adj | GND | H32_FMCOUT7 | H31_FMCOUT6 | H17_FMCIN5 | GND | VL / Adj | OPIN | H16_FMCIN4 | IO H11 | H29_FMCOUT5 | VH / Adj | OPOUT H10 | GND | H28_FMCOUT4 | H14_FMCIN3 | OFFSETIN1 | H13_FMCIN2 | OPBUF1 | GND | H11_FMCIN1 | AR SDAIN | H10_FMCIN0 | AR SCLIN | GND | GND | H8 | H7 | C10GX FMC breakout, v1.2 / by Andre Dubovskiy and Dr. Andy Haas / NYU, 2023